# EAGLE board PocketBelaCape (EAGLE 6.5.0)
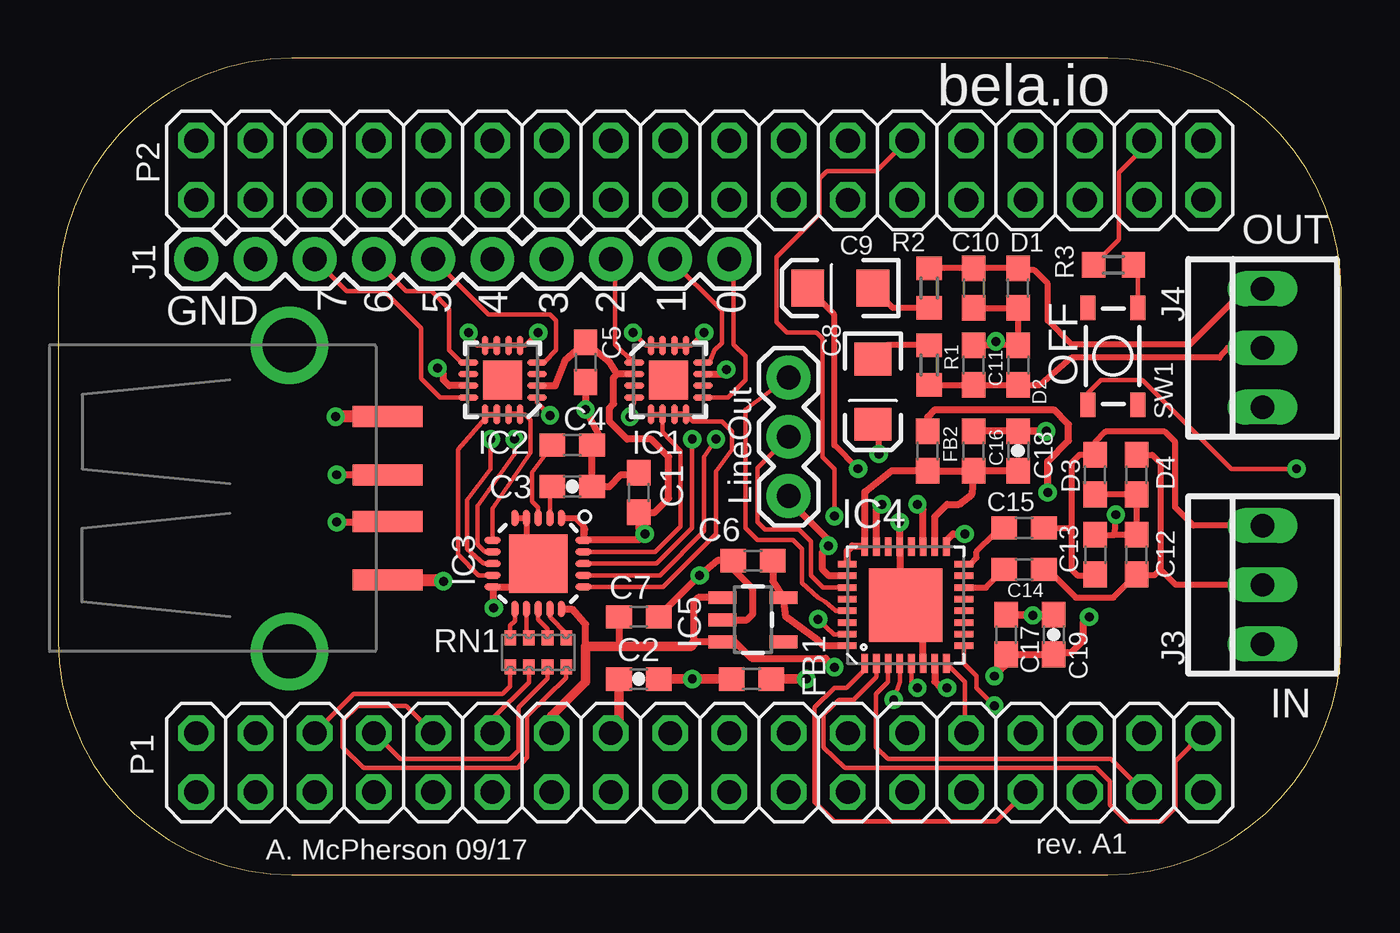
[diagram p0: board, top side]
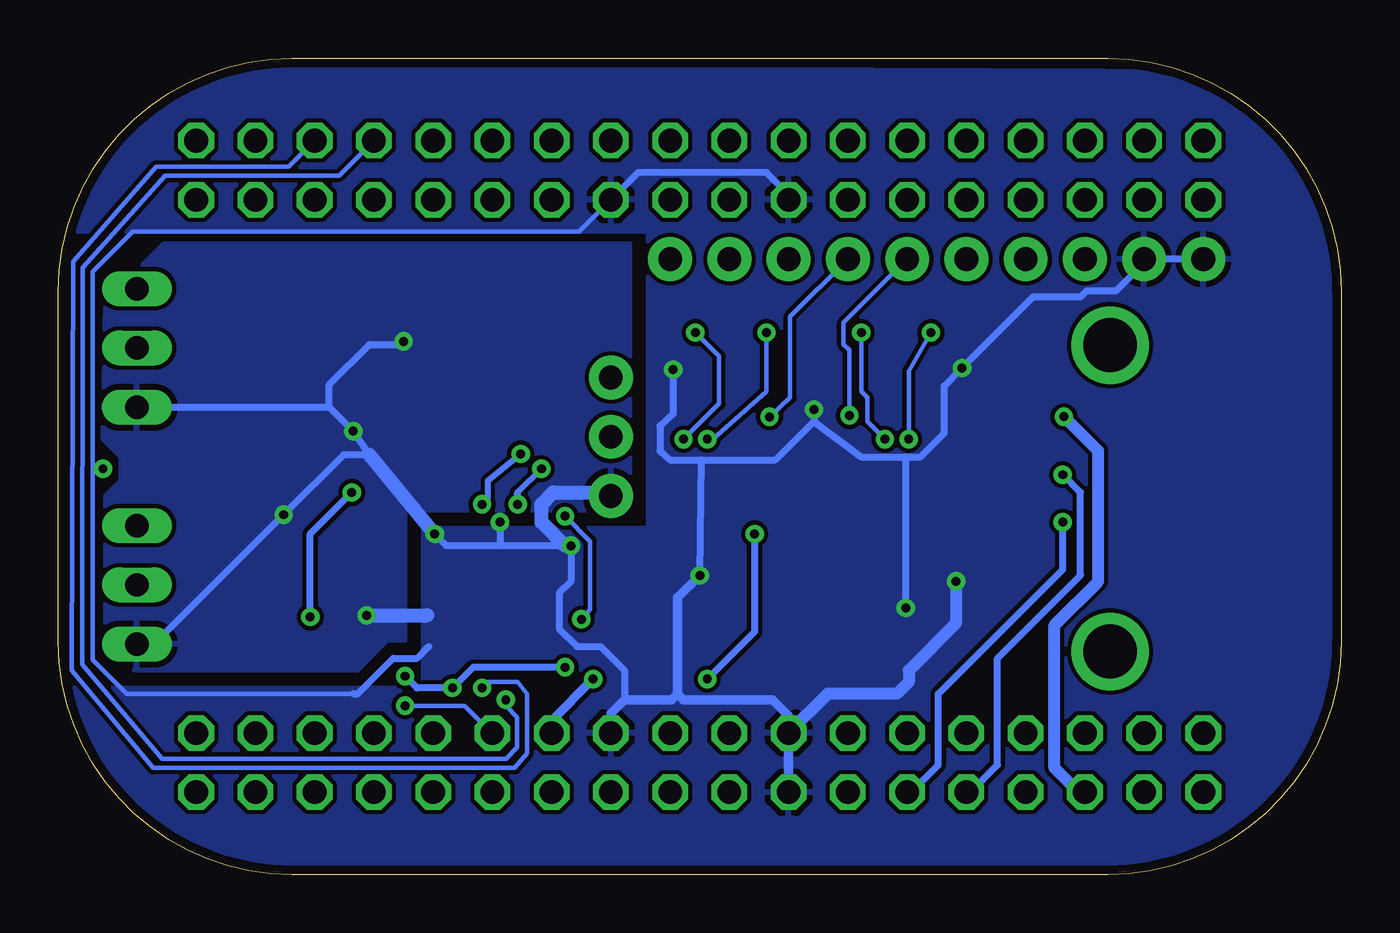
[diagram p1: board, bottom side, seen from below]

Size 55 x 35 mm. Coordinates in mm from the lower left corner, seen from the top.
Outline: 45,35 10,35 arc90 0,25 0,10 arc90 10,0 45,0 arc90 55,10 55,25 arc90 45,35
Copper layers (1*16): Top 0.035mm / dielectric 1.5mm / Bottom 0.035mm
Design rules "default *": minimum track width 8mil, minimum drill 15mil, track to track 7mil, track to pad 7mil, pad to pad 7mil, via to via 7mil, smd to smd 0mil, copper to edge 15mil, drill to drill 8mil, minimum pad ring 10mil, minimum via ring 8mil, stop-mask expansion 4mil, vias tented up to drill 20mil, thermal gap 10mil

## Footprints (pad centres in the part's own frame; a part is rotated, then mirrored left to right if it is on the bottom)
C0603 = smd 1.1 x 1: 1 -0.85,0; 2 0.85,0
0603-CAP = smd 1.1 x 1: 1 -0.85,0; 2 0.85,0
EIA3216 = smd 1.4 x 1.6: A 1.4,0; C -1.4,0
0603 = smd 1.1 x 1: 1 -0.85,0; 2 0.85,0
QFN16-3X3 = smd 0.85 x 0.28: 1 -1.475,0.75; 2 -1.475,0.25; 3 -1.475,-0.25; 4 -1.475,-0.75; 9 1.475,-0.75; 10 1.475,-0.25; 11 1.475,0.25; 12 1.475,0.75 | smd 0.28 x 0.85: 5 -0.75,-1.475; 6 -0.25,-1.475; 7 0.25,-1.475; 8 0.75,-1.475; 13 0.75,1.475; 14 0.25,1.475; 15 -0.25,1.475; 16 -0.75,1.475 | smd 1.68 x 1.68: EXT 0,0
LFCSP20-LEADS = smd 0.7 x 0.3: 1 -1.95,1; 2 -1.95,0.5; 3 -1.95,0; 4 -1.95,-0.5; 5 -1.95,-1; 11 1.95,-1; 12 1.95,-0.5; 13 1.95,0; 14 1.95,0.5; 15 1.95,1 | smd 0.3 x 0.7: 6 -1,-1.95; 7 -0.5,-1.95; 8 0,-1.95; 9 0.5,-1.95; 10 1,-1.95; 16 1,1.95; 17 0.5,1.95; 18 0,1.95; 19 -0.5,1.95; 20 -1,1.95 | smd 2.5 x 2.5: EXP 0,0
QFN-32 = smd 0.285 x 0.8: 1 -1.75,-2.5; 2 -1.25,-2.5; 3 -0.75,-2.5; 4 -0.25,-2.5; 5 0.25,-2.5; 6 0.75,-2.5; 7 1.25,-2.5; 8 1.75,-2.5; 17 1.75,2.5; 18 1.25,2.5; 19 0.75,2.5; 20 0.25,2.5; 21 -0.25,2.5; 22 -0.75,2.5; 23 -1.25,2.5; 24 -1.75,2.5 | smd 0.8 x 0.285: 9 2.5,-1.75; 10 2.5,-1.25; 11 2.5,-0.75; 12 2.5,-0.25; 13 2.5,0.25; 14 2.5,0.75; 15 2.5,1.25; 16 2.5,1.75; 25 -2.5,1.75; 26 -2.5,1.25; 27 -2.5,0.75; 28 -2.5,0.25; 29 -2.5,-0.25; 30 -2.5,-0.75; 31 -2.5,-1.25; 32 -2.5,-1.75 | smd 3.15 x 3.15: EP 0,0
SOT23-5 = smd 0.55 x 1.2: 1 -0.95,-1.3; 2 0,-1.3; 3 0.95,-1.3; 4 0.95,1.3; 5 -0.95,1.3
1X10 = drill 1.016 pad 1.88: 1 0,0; 2 2.54,0; 3 5.08,0; 4 7.62,0; 5 10.16,0; 6 12.7,0; 7 15.24,0; 8 17.78,0; 9 20.32,0; 10 22.86,0
1X03 = drill 1.016 pad 1.88: 1 0,0; 2 2.54,0; 3 5.08,0
22-23-2031 = drill 1 long: 1 -2.54,0; 2 0,0; 3 2.54,0
USB-A-S-NOSILK-FEMALE = smd 3 x 0.9: D+ 4.212,-1; D- 4.212,1; GND 4.212,-3.5; VBUS 4.212,3.5 | drill 2.311: S1 0,-6.566; S2 0,6.566
2X18 = drill 1.016 octagon: 1 -21.59,-1.27; 2 -21.59,1.27; 3 -19.05,-1.27; 4 -19.05,1.27; 5 -16.51,-1.27; 6 -16.51,1.27; 7 -13.97,-1.27; 8 -13.97,1.27; 9 -11.43,-1.27; 10 -11.43,1.27; 11 -8.89,-1.27; 12 -8.89,1.27; 13 -6.35,-1.27; 14 -6.35,1.27; 15 -3.81,-1.27; 16 -3.81,1.27; 17 -1.27,-1.27; 18 -1.27,1.27; 19 1.27,-1.27; 20 1.27,1.27; 21 3.81,-1.27; 22 3.81,1.27; 23 6.35,-1.27; 24 6.35,1.27; 25 8.89,-1.27; 26 8.89,1.27; 27 11.43,-1.27; 28 11.43,1.27; 29 13.97,-1.27; 30 13.97,1.27; 31 16.51,-1.27; 32 16.51,1.27; 33 19.05,-1.27; 34 19.05,1.27; 35 21.59,-1.27; 36 21.59,1.27
R0603 = smd 1 x 1.1: 1 -0.85,0; 2 0.85,0
0603-ARC = smd 0.5 x 0.65: 1 -1.2,-0.625; 2 -0.4,-0.625; 3 0.4,-0.625; 4 1.2,-0.625; 5 1.2,0.625; 6 0.4,0.625; 7 -0.4,0.625; 8 -1.2,0.625
TACTILE_SWITCH_SMD-4 = smd 1.05 x 0.65: 1 -2.075,1.075; 2 2.075,1.075; 3 -2.075,-1.075; 4 2.075,-1.075

## Placement (x,y rotation side)
C1  0.1uF  [C0603]  24.89,16.38 90 top
C2  10uF  [0603-CAP]  24.89,8.38 180 top
C3  10uF  [0603-CAP]  22.03,16.64 0 top
C4  0.1uF  [C0603]  22.03,18.41 0 top
C5  0.1uF  [C0603]  22.61,21.97 270 top
C6  0.1uf  [C0603]  29.78,13.46 180 top
C7  1uf  [C0603]  24.89,11.05 0 top
C8  47uf  [EIA3216]  34.93,20.7 270 top
C9  47uf  [EIA3216]  33.53,25.15 180 top
C10  47pF  [C0603]  39.24,25.15 270 top
C11  47pF  [C0603]  39.24,21.84 90 top
C12  47pF  [C0603]  46.23,13.72 90 top
C13  47pF  [C0603]  44.45,13.72 270 top
C14  1uF  [C0603]  41.4,13.08 180 top
C15  1uF  [C0603]  41.4,14.86 0 top
C16  0.1uf  [C0603]  39.24,18.16 90 top
C17  0.1uf  [C0603]  40.64,10.29 90 top
C18  10uf,10V  [0603-CAP]  41.15,18.16 270 top
C19  10uf,10V  [0603-CAP]  42.67,10.29 270 top
D1  PGB0010603MR  [0603]  41.15,25.15 90 top
D2  PGB0010603MR  [0603]  41.15,21.84 270 top
D3  PGB0010603MR  [0603]  44.45,17.14 90 top
D4  PGB0010603MR  [0603]  46.23,17.14 90 top
FB1  FB  [0603]  29.72,8.38 0 top
FB2  FB  [0603]  37.27,18.16 90 top
IC1  ADD8704  [QFN16-3X3]  26.16,21.21 0 top
IC2  ADD8704  [QFN16-3X3]  19.05,21.21 180 top
IC3  AD7699  [LFCSP20-LEADS]  20.57,13.34 270 top
IC4  TLV320AIC3104  [QFN-32]  36.32,11.56 0 top
IC5  V_REG_LDOSMD  [SOT23-5]  29.78,10.92 270 top
J1  M10SILK_FEMALE_PTH  [1X10]  5.91,26.39 0 top
J2  DNI  [1X03]  31.31,16.23 90 top
J3  22-23-2031  [22-23-2031]  51.63,12.42 90 top
J4  22-23-2031  [22-23-2031]  51.63,22.58 90 top
J5  USB-A-SMD  [USB-A-S-NOSILK-FEMALE]  9.91,16.13 0 top
P1  [2X18]  27.5,4.8 0 top
P2  [2X18]  27.5,30.2 0 top
R1  33  [R0603]  37.34,21.84 90 top
R2  33  [R0603]  37.34,25.15 270 top
R3  100  [R0603]  45.24,26.15 180 top
RN1  22  [0603-ARC]  20.57,9.52 180 top
S1  SWITCH-MOMENTARY-2SMD-5  [TACTILE_SWITCH_SMD-4]  45.21,22.22 270 top

## Library data of the parts
C1 C4 C5 R3 = rcl
C2 C3 FB1 = SparkFun-Passives
C6 C16 C17 = rcl; MANEX: 123-0001056
C7 = rcl; MANEX: 123-0001087
C8 C9 = SparkFun-Capacitors; MANEX: 123-0001196
C10-C13 = rcl; MANEX: 123-0001115
C14 C15 = rcl; MANEX: 123-0001032
C18 C19 = SparkFun-Passives; MANEX: 123-0001127
D1-D4 = CircuitCo; MANEX: 130-0001371
FB2 = SparkFun-Passives; MANEX: 126-0001418
IC1-IC3 S1 = custom
IC4 = CircuitCo; MANEX: 140-0004277
IC5 = SparkFun-PowerIC; MANEX: 140-0001616
J1 = SparkFun-Connectors; PROD_ID: CONN-11563
J2 = SparkFun-Connectors
J3 J4 = con-molex; MF: MOLEX; MPN: 22-23-2031; OC_FARNELL: 1462950; OC_NEWARK: 30C0862
J5 = SparkFun-Connectors; PROD_ID: CONN-09520
P1 P2 = pinhead
R1 R2 = rcl; MANEX: 110-0002014
RN1 = resistor-dil; OC_FARNELL: unknown; OC_NEWARK: unknown

## Nets
1.8V: C6.1 IC4.32 IC5.5
3.3V: C7.1 C17.1 C19.2 FB2.2 IC3.15 IC4.7 IC5.1 IC5.3 P1.14
+5V_ADC_DAC: C1.1 C2.1 C5.1 FB1.1 IC1.2 IC2.2 IC3.1 IC3.20
+5V_SYS: FB1.2 P1.24
AUD_3V3: C16.1 C18.2 FB2.1 IC4.18 IC4.24 IC4.25
AUD_BCLK: IC4.2 P1.36
AUD_DIN: IC4.5 P2.32
AUD_DOUT: IC4.4 P2.30
AUD_HPLOUT: C8.A IC4.19
AUD_HPROUT: C9.A IC4.23
AUD_MCLK: IC4.1 P1.29
AUD_WCLK: IC4.3 P1.33
AUDIO_INL: C12.1 C14.1 D4.2 J3.2
AUDIO_INR: C13.2 C15.2 D3.2 J3.3
GND: C1.2 C2.2 C3.2 C4.2 C5.2 C6.2 C7.2 C10.2 C11.2 C12.2 C13.1 C16.2 C17.2 C18.1 C19.1 D1.1 D2.1 D3.1 D4.1 IC1.11 IC2.11 IC3.4 IC3.5 IC3.10 IC3.EXP IC4.6 IC4.17 IC4.21 IC4.26 IC4.EP IC5.2 J1.1 J1.2 J2.1 J3.1 J4.1 J5.GND P1.15 P1.16 P1.22 P2.15 P2.21 S1.4
HPL: C11.1 D2.2 J4.2 R1.1
HPR: C10.1 D1.2 J4.3 R2.1
LEFT_LOM: IC4.28
LEFT_LOP: IC4.27 J2.2
LINE1LP: C14.2 IC4.14
LINE1RP: C15.1 IC4.16
N$1: J5.VBUS P1.5
N$2: J5.D- P1.9
N$3: J5.D+ P1.11
N$7: IC1.7 IC1.8 IC3.16
N$8: IC1.13 IC1.14 IC3.17
N$9: IC2.15 IC2.16 IC3.6
N$10: IC2.5 IC2.6 IC3.7
N$11: IC2.7 IC2.8 IC3.8
N$12: IC2.13 IC2.14 IC3.9
N$14: IC3.11 RN1.4
N$20: IC3.12 RN1.3
N$21: C3.1 IC3.2
N$22: C4.1 IC3.3
N$23: IC3.13 RN1.2
N$24: IC3.14 RN1.1
N$27: IC1.5 IC1.6 IC3.19
N$29: IC2.1 J1.6
N$30: IC1.15 IC1.16 IC3.18
N$37: IC1.9 J1.10
N$38: IC1.12 J1.9
N$39: IC1.1 J1.8
N$40: IC1.4 J1.7
N$42: IC2.4 J1.5
N$43: IC2.9 J1.4
N$44: IC2.12 J1.3
N$54: C8.C R1.2
N$58: R3.1 S1.1
N$59: C9.C R2.2
RESETN: IC4.31 P2.26
RIGHT_LOP: IC4.29 J2.3
RIGHT_ROM: IC4.30
SCL: IC4.8 P1.28
SDA: IC4.9 P1.26
SHUTDOWN_REQ/: P2.34 R3.2
SPI_ADC_CNV: P1.6 RN1.5
SPI_MISO: P1.10 RN1.8
SPI_MOSI: P1.12 RN1.6
SPI_SCK: P1.8 RN1.7

## Tracks (layer width: path | path; a pad name or v marks a point on that pad's centre or on a via)
1.8V
  Top 0.305: IC4.32 32.81,9.81 32.56,10.03 31.19,11.05 IC5.5 | 31.14,11.81 IC5.5 | C6.1 30.63,12.58 IC5.5
3.3V  (via drill 0.38)
  Top 0.305: IC5.1 27.43,11.87 27.24,11.68 27.24,9.91 27.31,9.97 IC5.3 29.02,9.97 29.72,9.27 32.89,9.27 v33.27,8.89 | IC4.7 37.57,8.27 37.85,8 v38.1,8 | v40.13,8.51 40.89,9.27 C17.1 C19.2 42.76,9.52 43.43,9.52 43.94,10.03 43.94,10.8 v44.2,11.05 | FB2.2 37.27,19.62 37.59,19.94 42.67,19.94 43.31,19.3 43.31,18.61 42.42,17.72 v42.42,16.38 | IC3.15 22.02,11.39 22.54,10.8 22.61,10.73 22.61,9.78 | C7.1 24.04,9.82 24,9.78
  Top 0.406: P1.14 21.15,6.8 22.61,8.25 22.61,9.78 24,9.78 27.11,9.78 27.24,9.91
  Bottom 0.305: v40.13,8.51 39.62,8 v38.1,8 37.21,8.89 v33.27,8.89 | v44.2,11.05 44.2,14.61 v42.42,16.38
+5V_ADC_DAC  (via drill 0.38)
  Top 0.254: 22.58,14.87 IC3.20 22.52,14.94 22.18,15.29 IC3.1
  Top 0.305: IC2.2 21.3,20.96 21.72,22.03 C5.1 23.62,21.97 23.96,21.46 | IC1.2 23.96,21.46 | IC3.20 22.54,14.35 24.89,14.35 v25.15,14.61 24.89,14.86 C1.1 25.57,15.53 26.16,16.13 26.16,17.91 25.4,18.67 24.38,18.67 23.62,19.43 23.62,20 23.81,20.19 23.81,21.31 23.96,21.46
  Top 0.406: C2.1 v27.18,8.38 FB1.1
  Bottom 0.305: v25.15,14.61 25.15,10.41 v27.18,8.38
+5V_SYS  (via drill 0.38)
  Top 0.406: v32.07,8.38 FB1.2
  Bottom 0.406: 33.85,5.85 P1.24 33.85,6.6 v32.07,8.38
AUD_3V3
  Top 0.305: C18.2 C16.1 | IC4.25 33.82,13.88 34.04,14.1 34.53,14.1 IC4.24 34.57,16.41 35.73,17.31 FB2.1 C16.1 | IC4.18 37.57,15.35 38.1,15.88 38.61,15.88 39.18,16.32 C16.1
AUD_BCLK
  Top 0.203: P1.36 47.88,4.86 47.88,2.86 47.31,2.29 45.78,2.29 45.09,2.99 45.09,4 44.51,4.57 33.72,4.57 32.8,5.46 32.8,6.86 33.46,7.49 34.1,7.49 35.07,8.46 IC4.2
AUD_DIN  (via drill 0.38)
  Top 0.203: IC4.5 36.57,8.26 v36.83,8
  Bottom 0.203: v36.83,8 36.58,8.25 35.31,8.25 34.9,7.75 34.9,5.21 35.43,4.57 50.93,4.57 54.42,8.76 54.37,26.29 50.8,30.35 45.13,30.35 P2.32
AUD_DOUT  (via drill 0.38)
  Top 0.203: IC4.4 36.07,8.26 v35.81,7.49
  Bottom 0.203: v35.81,7.49 35.81,7.24 35.33,6.73 35.33,5.46 35.81,4.95 50.55,4.95 53.98,9.02 53.95,26.04 50.42,29.97 42.97,29.97 P2.30
AUD_HPLOUT  (via drill 0.38)
  Top 0.254: v35.18,18.03 35.18,19.05 C8.A
  Top 0.305: IC4.19 37.07,15.63 v36.83,15.88
  Bottom 0.254: 36.58,15.88 36.58,16.89 v35.18,18.03
  Bottom 0.305: v36.83,15.88 36.58,15.88
AUD_HPROUT  (via drill 0.38)
  Top 0.254: v34.29,17.4 33.27,18.41 33.27,24 C9.A
  Top 0.305: IC4.23 35.07,15.64 v35.31,15.88
  Bottom 0.254: 35.31,16.38 v34.29,17.4
  Bottom 0.305: v35.31,15.88 35.31,16.38
AUD_MCLK
  Top 0.203: P1.29 40.23,2.29 33.27,2.29 32.42,3.11 32.42,7.18 33.27,8 33.78,8 34.57,8.79 IC4.1
AUD_WCLK
  Top 0.203: IC4.3 35.57,8.27 35.05,7.75 35.05,5.46 35.56,4.95 45.13,4.95 P1.33
AUDIO_INL
  Top 0.254: D4.2 46.9,18 47.24,17.65 47.24,13.08 | 47.24,13.08 46.99,12.83 46.27,12.83 C12.1 45.24,11.88 43.62,11.88 42.42,13.08 | J3.2 47.91,12.42 47.24,13.08
  Top 0.305: C14.1 42.42,13.08
AUDIO_INR
  Top 0.254: 43.43,14.86 43.43,17.65 43.78,18 D3.2 44.45,18.54 44.89,18.99 47.43,18.99 47.88,18.54 47.88,15.75 48.67,14.96 J3.3 | 43.43,14.86 43.43,13.08 43.69,12.83 44.41,12.83 C13.2 | C15.2 43.43,14.86
GND  (via drill 0.38, 0.38 pad 0.41)
  Top 0.203: S1.4 44.14,20.64 44.7,21.21 46.48,21.21 50.29,17.4 v53.09,17.4
  Top 0.254: IC3.5 IC3.4 20.07,13.84 IC3.EXP | 45.3,14.57 C12.2 D4.1 D3.1 | C13.1 45.3,14.57 | 45.3,14.57 v45.34,15.43 | C10.2 D1.1 D2.1 C11.2 39.97,22.69 v40.2,22.86
  Top 0.305: IC4.6 37.07,10.81 IC4.EP 36.07,11.81 IC4.21 v36.07,15.11 | IC5.2 29.53,10.92 29.78,11.18 29.78,12.26 28.93,13.11 C6.2 28.26,13.46 v27.5,12.83 25.74,11.07 C7.2 | C19.1 C17.2 41.57,11.14 v41.78,11.11 | IC1.11 28.44,21.46 v28.64,21.65 | IC2.11 16.76,20.96 16.51,21.21 16.51,21.46 v16.26,21.72 | C1.2 24.8,17.14 24.13,17.14 23.62,16.64 C3.2 C4.2 23.2,18.84 v22.61,19.94 C5.2 | IC3.EXP 19.57,12.34 IC3.10 18.67,12.29 v18.67,11.43 | IC4.26 33.04,12.81 32.77,13.08 32.77,13.84 v33.02,14.1 33.02,14.35 31.75,15.62 31.75,15.79 J2.1 | C18.1 v42.36,19.01 C16.2 | IC4.17 38.07,14.32 38.35,14.61 v38.86,14.61
  Top 0.406: C2.2 24.04,6.42 P1.16
  Top 0.508: J5.GND 16.45,12.63 v16.51,12.57
  Bottom 0.203: P2.21 32.68,27.56 51.82,27.56 53.53,25.84 53.53,17.4 | 53.53,17.4 53.53,9.21 52.07,7.75 42.36,7.75 | v53.09,17.4 53.53,17.4
  Bottom 0.254: v45.34,15.43 45.34,15.37
  Bottom 0.305: v16.26,21.72 16.51,21.72 | v22.61,19.94 22.61,19.43 | 22.61,19.43 20.57,17.91 18.67,17.91 | 18.67,17.91 18.03,17.91 17.02,18.92 17.02,20.95 v16.26,21.72 | v28.64,21.65 28.64,19.75 29.21,19.24 29.21,18.16 28.77,17.78 27.43,17.78 | 27.43,17.78 24.26,17.78 22.61,19.43 | v18.67,11.43 18.67,17.91 | J1.1 J1.2 8.45,26.22 9.65,25.02 10.92,25.02 11.18,24.77 13.21,24.77 v16.26,21.72 | v27.5,12.83 27.43,17.78 | 36.07,14.1 v33.02,14.1 33.02,12.57 33.53,12.07 33.53,10.54 32.77,9.78 31.75,9.78 30.73,8.76 30.73,7.49 | 36.07,14.1 38.35,14.1 v38.86,14.61 | J4.1 43.38,20.04 | 43.38,20.04 v42.36,19.01 41.66,18 42.77,18 v45.34,15.43 50.89,9.88 J3.1 | v36.07,15.11 36.07,14.1 | P2.15 23.69,29.15 24.64,30.1 30.14,30.1 P2.21 | 43.38,20.04 43.38,21 41.66,22.73 40.32,22.73 v40.2,22.86 | 42.36,7.75 42.16,7.75 40.64,9.27 39.62,9.27 39.12,9.78 | 39.18,11.11 39.12,11.05
  Bottom 0.406: P1.15 P1.16 23.69,6.8 24.38,7.49 28.19,7.49 28.45,7.75 | 28.45,7.75 28.45,11.88 v27.5,12.83 | P1.22 31.31,6.92 30.73,7.49 28.7,7.49 28.45,7.75
  Bottom 0.508: v16.51,12.57 16.51,10.8 18.54,8.76 18.54,8.25 19.05,7.75 22.01,7.75 P1.16
  Bottom 0.61: v38.86,14.61 41.66,18 | v41.78,11.11 39.18,11.11 | v33.02,14.1 33.27,14.1 34.29,15.11 34.29,15.88 33.78,16.38 31.24,16.38
  pour Bottom: 55.37,0.13 0.25,0.13 0.25,34.42 54.61,34.67 54.61,27.56 29.72,27.56 29.72,14.86 39.37,14.86 39.37,8 55.12,8
  pour Bottom: 30.48,27.05 50.48,27.05 52.98,24.55 53.09,18.67 52.32,17.91 52.32,16.89 52.98,16.23 52.98,10.03 51.71,8.76 42.16,8.76 40.89,10.03 40.13,10.03 40.13,15.62 30.48,15.62
HPL
  Top 0.254: R1.1 C11.1 D2.2 42.08,20.99 43.43,22.16 49.78,22.16 50.14,22.58 J4.2
HPR
  Top 0.254: R2.1 C10.1 D1.2 41.24,25.91 41.85,25.91 42.42,25.34 42.42,23.75 43.43,22.73 48.51,22.73 50.9,25.12 J4.3
LEFT_LOP
  Top 0.203: IC4.27 32.78,12.31 32.26,12.83 32.26,14.29 31.75,14.8 30.29,14.8 29.97,15.11 29.97,17.43 J2.2
LINE1LP
  Top 0.254: IC4.14 39.78,12.31 C14.2
LINE1RP
  Top 0.254: IC4.16 39.09,13.31 39.37,13.59 39.37,13.84 40.13,14.61 40.3,14.61 C15.1
N$1  (via drill 0.38)
  Top 0.508: 11.94,19.68 v11.89,19.63 v11.88,19.63 J5.VBUS
  Bottom 0.508: P1.5 11.25,3.53 12.29,4.57 12.29,10.69 10.41,12.57 10.41,18.16 v11.89,19.63
N$2  (via drill 0.38)
  Top 0.305: v11.94,17.14 14.1,17.14 J5.D-
  Bottom 0.305: P1.9 15.9,3.53 14.73,4.7 14.73,9.27 11.18,12.83 11.18,16.38 v11.94,17.14
N$3  (via drill 0.38)
  Top 0.305: v11.94,15.11 14.1,15.11 J5.D+
  Bottom 0.305: P1.11 18.44,3.53 17.27,4.7 17.27,7.75 11.94,13.08 v11.94,15.11
N$7
  Top 0.203: IC3.16 25.92,12.34 28.19,14.61 28.19,17.27 28.89,18.22 28.89,18.99 28.45,19.43 27.21,19.43 IC1.8
  Top 0.254: IC1.8 IC1.7
N$8  (via drill 0.38)
  Top 0.203: IC1.13 27.13,22.68 v27.69,23.24 | IC3.17 25.79,12.84 27.69,14.73 27.69,17.91 v28.19,18.67
  Top 0.254: IC1.14 IC1.13
  Bottom 0.203: v28.19,18.67 26.67,20.19 26.67,22.22 v27.69,23.24
N$9
  Top 0.203: IC2.15 20.02,19.73 20.26,19.49 20.26,18.1 18.62,15.7 IC3.6
  Top 0.254: IC2.16 IC2.15
N$10  (via drill 0.38)
  Top 0.203: IC3.7 18.3,13.84 17.97,14.16 17.97,15.81 19.56,18.03 v19.56,18.67 | IC2.6 20.02,22.68 v20.57,23.24
  Top 0.254: IC2.5 IC2.6
  Bottom 0.203: v20.57,23.24 20.57,20.7 20.32,20.45 20.32,19.43 v19.56,18.67
N$11  (via drill 0.38)
  Top 0.203: IC3.8 18.23,13.34 17.53,13.97 17.53,16.07 18.54,17.4 v18.54,18.67 | IC2.8 17.96,22.68 v17.59,23.24
  Top 0.254: IC2.8 IC2.7
  Bottom 0.203: v18.54,18.67 18.54,21.59 v17.59,23.24
N$12
  Top 0.203: IC3.9 18.03,12.84 17.14,13.72 17.14,18.22 18.29,19.56 18.29,19.72 IC2.13
  Top 0.254: IC2.13 IC2.14
N$14
  Top 0.203: IC3.11 19.57,10.88 19.37,10.68 RN1.4
N$20
  Top 0.203: IC3.12 20.07,10.25 RN1.3
N$21
  Top 0.203: IC3.2 21.07,16.21 C3.1
N$22
  Top 0.203: IC3.3 20.57,15.75 20.32,16 20.32,17.23 C4.1
N$23
  Top 0.203: IC3.13 20.57,10.93 20.97,10.54 RN1.2
N$24
  Top 0.203: IC3.14 21.07,11.04 21.77,10.34 RN1.1
N$27
  Top 0.203: IC3.19 25.58,13.84 26.67,14.92 26.67,18.16 25.91,18.97 IC1.6
  Top 0.254: IC1.5 IC1.6
N$29  (via drill 0.38)
  Top 0.203: IC2.1 20.53,20.24 v21.08,19.68
  Bottom 0.203: v21.08,19.68 21.08,22.48 21.34,22.73 21.34,23.66 J1.6
N$30  (via drill 0.38)
  Top 0.203: IC1.15 25.2,22.68 v24.64,23.24 | IC3.18 25.65,13.34 27.18,14.86 v27.18,18.67
  Top 0.254: IC1.15 IC1.16
  Bottom 0.203: 24.64,22.99 v24.64,23.24 24.64,20.7 26.92,18.67 v27.18,18.67
N$37
  Top 0.203: IC1.9 28.71,20.46 29.46,21.21 29.46,22.22 28.96,22.73 28.96,26.2 J1.10
N$38
  Top 0.203: IC1.12 27.93,21.96 28.13,22.48 28.45,22.8 28.45,24.17 J1.9
N$39
  Top 0.203: IC1.1 24.65,21.96 23.88,22.73 23.88,26.2 J1.8
N$40  (via drill 0.38)
  Top 0.203: IC1.4 24.69,20.24 v24.51,19.62
  Bottom 0.203: v24.51,19.62 23.62,20.45 23.62,23.92 J1.7
N$42
  Top 0.203: IC2.4 20.82,21.96 21.34,22.48 21.34,23.75 21.08,24 18.46,24 J1.5
N$43
  Top 0.203: IC2.9 17.28,21.96 16.76,22.48 16.76,24.26 16,25.02 14.9,25.02 J1.4
N$44
  Top 0.203: IC2.12 16.37,20.46 15.56,21.27 15.56,23.43 13.97,25.02 12.36,25.02 J1.3
N$54
  Top 0.254: R1.2 35.52,22.69 C8.C
N$58
  Top 0.203: S1.1 46.29,25.95 R3.1
N$59
  Top 0.254: R2.2 35.78,24.3 C9.C
RESETN  (via drill 0.38)
  Top 0.203: IC4.31 33.25,10.31 v32.58,10.95 | v33.27,15.37 33.27,17.4 32.77,17.91 32.77,22.99 32.51,23.24 31.24,23.24 30.8,23.68 30.8,26.48 32.64,28.32 32.64,29.85 32.96,30.16 35.08,30.16 P2.26
  Bottom 0.203: v32.58,10.95 32.2,11.37 32.2,14.29 v33.27,15.37
RIGHT_LOP
  Top 0.203: IC4.29 33.33,11.31 32.89,11.68 32.58,11.88 31.88,12.51 31.88,13.97 31.5,14.35 29.97,14.35 29.46,14.86 29.46,19.94 J2.3
SCL
  Top 0.203: IC4.8 38.86,8.25 38.86,6.14 P1.28
SDA  (via drill 0.38)
  Top 0.203: IC4.9 38.82,9.06 39.37,8.51 39.37,8 v40.13,7.24
  Bottom 0.203: P1.26 36.42,6.07 37.59,7.24 v40.13,7.24
SHUTDOWN_REQ/
  Top 0.203: P2.34 46.55,31.18 45.47,30.1 45.47,27.23 R3.2
SPI_ADC_CNV
  Top 0.203: RN1.5 19.37,8.07 19.05,7.75 12.67,7.75 P1.6
SPI_MISO
  Top 0.203: RN1.8 21.77,8.44 20.1,6.8 20.1,5.02 19.69,4.57 13.08,4.57 12.19,5.46 12.19,6.6 12.83,7.24 14.9,7.24 P1.10
SPI_MOSI
  Top 0.203: RN1.6 20.17,8.24 18.61,6.67 P1.12
SPI_SCK
  Top 0.203: RN1.7 20.97,8.4 19.72,7.18 19.72,5.33 19.37,4.95 14.65,4.95 P1.8

## Text on the board
tPlace: bela.io | OUT | GND | 7 | 6 | 5 | 4 | 3 | 2 | 1 | 0 | LineOut | IN | A. McPherson 09/17 | rev. A1
tNames: SW1 | OFF